# EAGLE board Clock Extension (EAGLE 7.6.0)

Size 20 x 54 mm. Coordinates in mm from the lower left corner, seen from the top.
Outline: 0,0 20,0 20,54 0,54 0,0
Copper layers (1*16): Top 0.035mm / dielectric 1.5mm / Bottom 0.035mm
Design rules "default": minimum track width 10mil, minimum drill 24mil, track to track 8mil, track to pad 8mil, pad to pad 8mil, via to via 8mil, smd to smd 8mil, copper to edge 40mil, drill to drill 8mil, minimum pad ring 10mil, minimum via ring 8mil, stop-mask expansion 4mil, vias tented up to drill 0mil, thermal gap 10mil

## Footprints (pad centres in the part's own frame; a part is rotated, then mirrored left to right if it is on the bottom)
EIA3216 = smd 1.4 x 1.6: A 1.4,0; C -1.4,0
1206 = smd 1.6 x 1.803: A -1.422,0; C 1.422,0
SO08 = smd 0.61 x 2.21: 1 -1.905,-2.616; 2 -0.635,-2.616; 3 0.635,-2.616; 4 1.905,-2.616; 5 1.905,2.616; 6 0.635,2.616; 7 -0.635,2.616; 8 -1.905,2.616
1X04 = drill 1.016 long: 1 -3.81,0; 2 -1.27,0; 3 1.27,0; 4 3.81,0
TRIM_POT_PTH = drill 1 pad 1.88: 1 -2.54,-2.54; 2 0,2.54; 3 2.54,-2.54
R1206 = smd 1.6 x 1.803: 1 -1.422,0; 2 1.422,0
MOLEX_480371000 = smd 1.2 x 2: 1 3.5,2.6; 2 1,2.6; 3 -1,2.6; 4 -3.5,2.6 | drill 2.5: M1 -5.7,0; M2 5.7,0 | hole 1.1: -2.25,0; 2.25,0

## Placement (x,y rotation side)
C1_10UF  10uF  [EIA3216]  10,29.5 180 top
LED_OUTPUT  [1206]  10.2,40 270 top
NE555N  [SO08]  5,21.5 270 top
OUT_1  [1X04]  10,52 0 top
OUT_2  [1X04]  18,40.5 270 top
OUT_3  [1X04]  2,40.5 90 top
R2_POT_100K  [TRIM_POT_PTH]  7,12 180 top
R_1K_1  [R1206]  17.5,11.5 90 top
R_1K_3  [R1206]  17.5,21.5 90 top
X1  USB-A  [MOLEX_480371000]  10,2.9 0 top

## Library data of the parts
C1_10UF = SparkFun-Capacitors; PROD_ID: CAP-00811
LED_OUTPUT R_1K_1 R_1K_3 X1 = adafruit
NE555N = SparkFun-AnalogIC
OUT_1-OUT_3 = pinhead
R2_POT_100K = SparkFun-Electromechanical

## Nets
DIS: NE555N.7 R2_POT_100K.3 R_1K_1.1
GND: C1_10UF.A NE555N.1 OUT_1.1 OUT_2.1 OUT_3.1 R_1K_3.1 X1.4
N$5: LED_OUTPUT.C R_1K_3.2
THRESHOLD: C1_10UF.C NE555N.2 NE555N.6 R2_POT_100K.2
TMR555_OUTPUT: LED_OUTPUT.A NE555N.3 OUT_1.3 OUT_2.3 OUT_3.3
VCC: NE555N.4 NE555N.8 OUT_1.2 OUT_2.2 OUT_3.2 R_1K_1.2 X1.1

## Tracks (layer width: path | path; a pad name or v marks a point on that pad's centre or on a via)
DIS  (2 unrouted)
GND  (6 unrouted)
N$5  (1 unrouted)
THRESHOLD  (3 unrouted)
TMR555_OUTPUT  (4 unrouted)
VCC  (6 unrouted)

## Text on the board
tNames: GND | VCC | OUT | NC | NC | GND | + | OUT | VCC | VCC | OUT | GND | NC | CLOCK MODULE | + | GND
bNames: PCBv1/SMD - 2019.12 | MadeInTheUSB.net